# Altium PCB KC_BaseBoard4CompareTest-V0.31.PcbDoc
Units mil, origin at the board's own origin, x right, y up, seen from the top; angles counter-clockwise.
Board outline 6850 x 2705 mil, 2 copper layers (Top Layer, Bottom Layer); 38 components, 27 nets, 101 pads, 4 vias.
Unrouted connection lines stored in the file: 1.
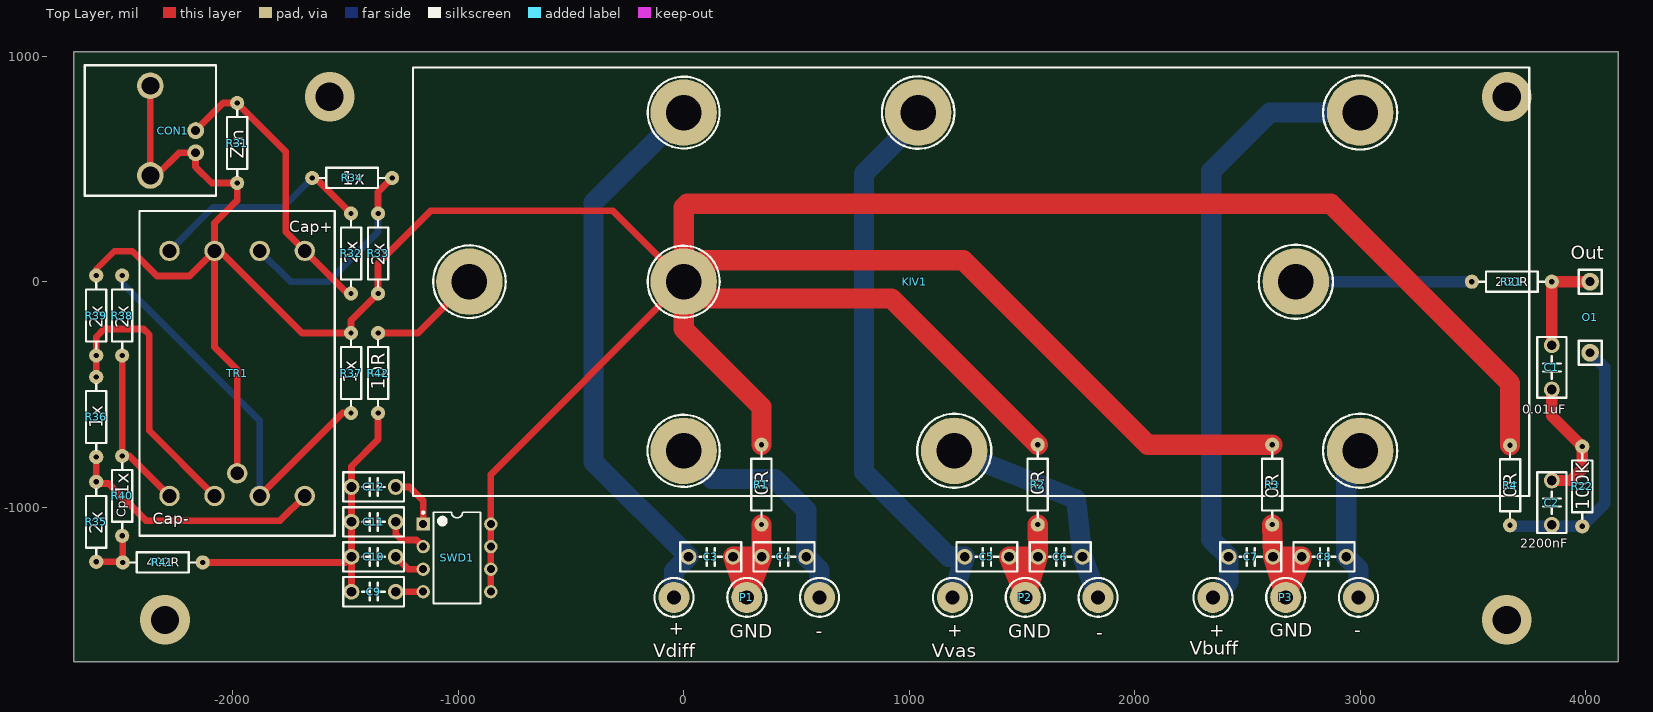
[diagram p0: Top Layer view]
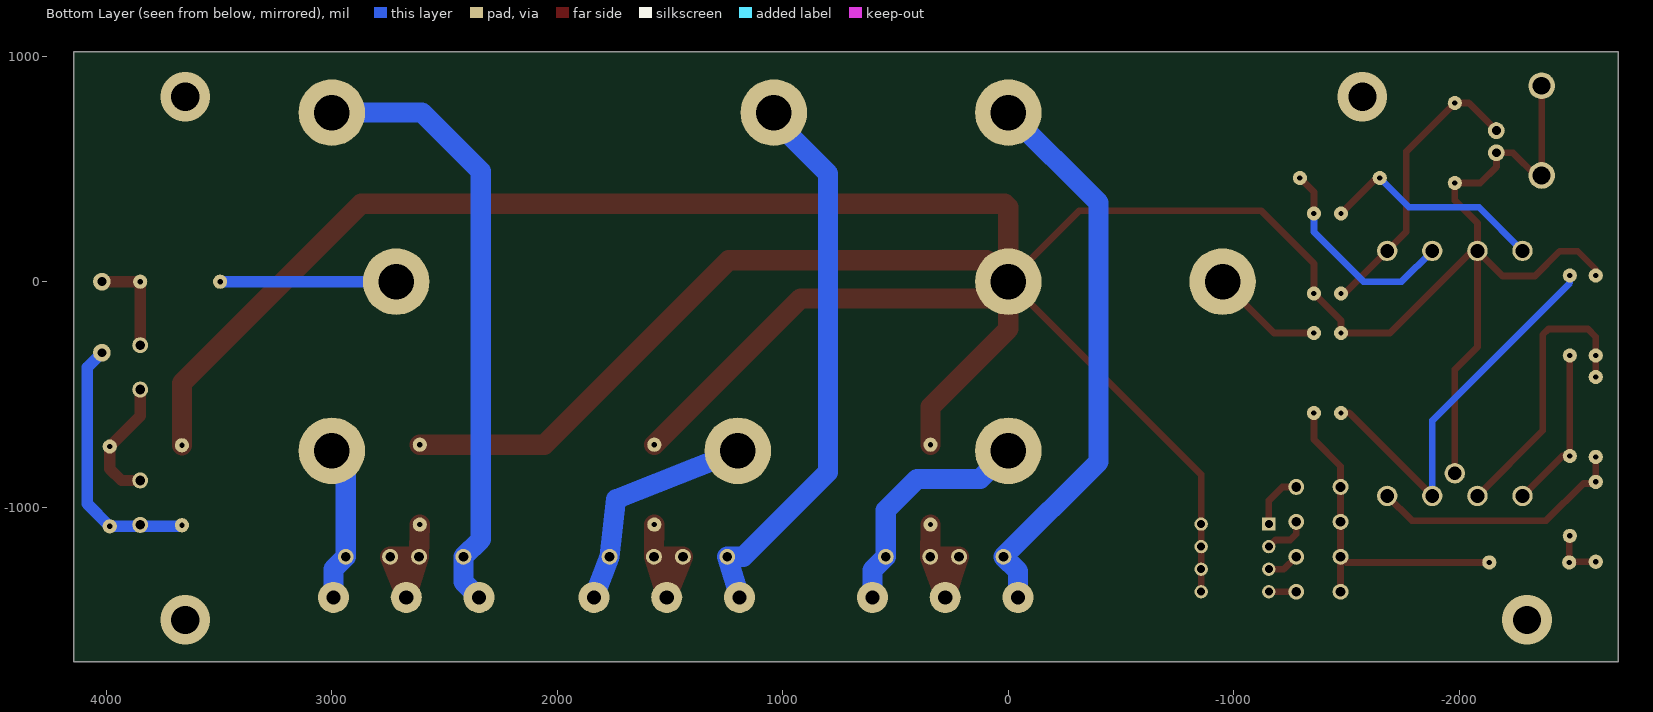
[diagram p1: Bottom Layer view, seen from below]

## Layer stack, top to bottom
Top Solder: solder mask 0.4, Solder Resist, Dk 3.5
Top Layer: signal copper 1.4
Dielectric 1: dielectric 12.6, FR-4, Dk 4.8
Bottom Layer: signal copper 1.4
Bottom Solder: solder mask 0.4, Solder Resist, Dk 3.5

## Board outline
-2705,-1685 4145,-1685 4145,1020 -2705,1020

## Design rules (kind name [scope] priority, off if disabled: settings)
Clearance [All] p1: gap=10 ignorepadtopadclearanceinfootprint=FALSE except(0: Arc-Hole Track-Hole SMDPad-Hole THPad-Hole Via-Hole Fill-Hole Poly-Hole Region-Hole Text-Hole)
PolygonConnect [All] p1: connectstyle=Relief reliefconductorwidth=10 reliefentries=4 polygonreliefangle="90 Angle" airgapwidth=10
RoomDefinition KC_BaseBoard4CompareTest-V0.31 [InComponentClass('KC_BaseBoard4CompareTest-V0.31')] p1: confinementstyle=ConfineIn formatcopy=TRUE lockcomponents=FALSE outline -3200,-3820 -1200,-3820 -1200,-2820 -3200,-2820
RoutingVias [All] p1: holewidth=28 width=50 viastyle="Through Hole" minholewidth=28 minwidth=50 maxholewidth=28 maxwidth=50
SolderMaskExpansion [All] p1: expansion=4
Width [All] p1: maxlimit=100 minlimit=10 preferedwidth=50
30 further rules are at their usual default settings.

## Components (designator, comment, footprint, x,y, rotation, side; value= is the part's Value field where it differs from the comment)
C1 "0.01uF" "CBB 6.3*6.3*5" 3850,-380 r90 top
C2 "2200nF" "CBB 6.3*6.3*5" 3850,-980 r270 top
C3 "0.01uF" "CBB 6.3*6.3*5" 120,-1220 r180 top
C4 "0.01uF" "CBB 6.3*6.3*5" 445,-1220 r180 top
C5 "0.01uF" "CBB 6.3*6.3*5" 1345,-1220 r0 top
C6 "0.01uF" "CBB 6.3*6.3*5" 1670,-1220 r180 top
C7 "0.01uF" "CBB 6.3*6.3*5" 2515,-1220 r0 top
C8 "0.01uF" "CBB 6.3*6.3*5" 2840,-1220 r180 top
C9 "100pF" "CBB 6.3*6.3*5" -1375,-1375 r180 top
C10 "100pF" "CBB 6.3*6.3*5" -1375,-1220 r180 top
C11 "100pF" "CBB 6.3*6.3*5" -1375,-1065 r180 top
C12 "20pF" "CBB 6.3*6.3*5" -1375,-910 r180 top
CON1 "RCA" RCA-RJ255 -2365,670 r0 top
KIV1 "KCInputVas_SP" KCIn_VAS_SP_M4 0,0 r0 top
O1 "Out" Signal_Terminal 4020,0 r270 top
P1 "Vdiff" KC_MBPowerReg4Compare-1.5mm 280,-1400 r90 top
P2 "Vvas" KC_MBPowerReg4Compare-1.5mm 1515,-1400 r90 top
P3 "Vbuff" KC_MBPowerReg4Compare-1.5mm 2670,-1400 r90 top
R1 "0R" "RS 1/4W" 345,-900 r270 top
R2 "0R" "RS 1/4W" 1570,-900 r270 top
R3 "0R" "RS 1/4W" 2610,-900 r270 top
R4 "0R" "RS 1/4W" 3665,-902.83 r90 top
R21 "200R" "RS 1/4W" 3672.83,0 r180 top
R22 "100K" "RS 1/4W" 3985,-907.83 r270 top
R31 "Zin" "RS 1/4W" -1980,615 r270 top
R32 "2x" "RS 1/4W" -1475,125 r270 top
R33 "2x" "RS 1/4W" -1355,125 r90 top
R34 "1x" "RS 1/4W" -1470,460 r0 top
R35 "2x" "RS 1/4W" -2605,-1065 r90 top
R36 "1x" "RS 1/4W" -2605,-600 r270 top
R37 "1x" "RS 1/4W" -1475,-405 r90 top
R38 "2x" "RS 1/4W" -2490,-150 r90 top
R39 "2x" "RS 1/4W" -2605,-150 r90 top
R40 "1x" "RS 1/4W" -2490,-950 r90 top
R41 "402R" "RS 1/4W" -2310,-1245 r0 top
R42 "10R" "RS 1/4W" -1355,-405 r90 top
SWD1 "SW-DIP4" DIP-8 -1005,-1225 r0 top
TR1 "LL1527" LL1527 -1980,-406.69 r270 top

## Footprints (in the part's own frame and the unit in brackets; to place one, negate y for a bottom-side part, rotate by r counter-clockwise, add the part's x,y. Pads: shape width x height; smd on the part's side, far side on the other; paste and mask are expansions set on the pad)
"CBB 6.3*6.3*5" [mm] "脚距5mm高6.3mm厚3mm"
  round 1.8 hole 1.1: 1(-2.5,0) 2(2.5,0)
  silkscreen extent -3.43,-1.65 3.43,1.65, body extent -3.15,-1.5 3.15,1.5, height 6.8
DIP-8 [mm] "DIP; 8 Leads; Row Spacing 7.62 mm; Pitch 2.54 mm"
  rect 1.5x1.5 hole 0.9: 1(-3.81,3.81)
  round 1.5 hole 0.9: 2(-3.81,1.27) 3(-3.81,-1.27) 4(-3.81,-3.81) 5(3.81,-3.81) 6(3.81,-1.27) 7(3.81,1.27) 8(3.81,3.81)
  silkscreen extent -3.93,-5.15 2.65,5.23, body extent -3.6,-5.15 3.6,5.15, height 5.08
KC_MBPowerReg4Compare-1.5mm [mm] "1.5mm hole size"
  round 3.5 hole 1.6: 1(0,8.2) 2(0,-8.2) 3(0,0)
  silkscreen extent -2.2,-10.4 2.2,10.4
KCIn_VAS_SP_M4 [mm]
  round 7.5 hole 4: 1(-24.13,0) 2(0,0) 3(0,19.05) 4(0,-19.05) 5(26.416,19.05) 6(30.48,-19.05) 7(76.2,19.05) 8(76.2,-19.05) 9(68.961,0)
  silkscreen extent -30.48,-24.13 95.25,24.13
LL1527 [mm] "Lundahl LL1527"
  round 2.3 hole 1.55: 1(-13.8,-7.62) 2(-13.8,-2.54) 3(-13.8,2.54) 4(-13.8,7.62) 5(13.8,-7.62) 6(13.8,-2.54) 7(13.8,2.54) 8(13.8,7.62) 9(11.26,0)
  silkscreen extent -18.3,-11 18.3,11
RCA-RJ255 [mm] "RCA Socket"
  round 1.9 hole 1: 1(5.1,0) 2(5.1,-2.5)
  round 3 hole 2.02: 2(0,-5.05) 2(0,5.05)
  silkscreen extent -7.4,-7.35 7.4,7.35
"RS 1/4W" [mm] "直插色环电阻，脚距9mm，直径2.3mm"
  round 1.6 hole 0.6: 1(-4.5,0) 2(4.5,0)
  silkscreen extent -3.68,-1.14 3.68,1.14, body extent -4.72,-1.16 4.73,1.16, height 2.32
Signal_Terminal [mm] "Signal Path Pin"
  round 2 hole 1: 1(0,0) 2(8,0)
  silkscreen extent -1.35,-1.3 9.35,1.3

## Part data
C1 C2 C3 C4 C5 C6 C7 C8 C9 C10 C11 C12: library part C-CBB, "CBB电容", BOM名称=CBB电容, 学习资源=www.ooocke.com, 版权归属=源创客
CON1: "RCA Connector", Publisher="Altium Limited", Revision="17-Jul-2002: Re-released for DXP Platform."
KIV1: "King Cello Input Stage and VAS for Seperated Power"
O1: library part Signal_Out, "Signal Out"
P1 P2 P3: library part MainBoardPowerRegulator4CompareTest, "King Cello Compare Test Power"
R1 R2 R3 R4 R21 R22 R31 R32 R33 R34 R35 R36 R37 R38 R39 R40 R41 R42: library part R-CRR, "直插色环电阻", BOM名称=色环电阻, 学习资源=www.ooocke.com, 版权归属=源创客
SWD1: "DIP Switch", LatestRevisionDate=17-Jul-2002, LatestRevisionNote="Re-released for DXP Platform.", PackageReference=DIP-8, Published=24-Mar-1999, Publisher="Altium Limited"
TR1: "Lundahl LL1527"

## Via types
v1: diameter 220, hole 125, Top Layer to Bottom Layer, 4 vias

## Nets (pads, with @x,y where several pads share a name; then routed paths per layer and width w, separated by ;. In a path a pad name is that pad's centre, name@x,y a point inside that pad or via, vN(x,y) a via of type N, cw(c..) or ccw(c..) an arc to the next point about the centre after c; other vN are vias at no path point)
NetC1_1: C1.1 C1.2 C2.1 O1.1 R21.1 R22.1 | length 1022.5
  Top Layer w50: C2.1 3933.43,-881.57 3985,-830 R22.1 3850,-595.67 C1.1 ; C1.2 R21.1 O1.1
  Bottom Layer w50: C1.2@3845,-281.57 C1.2@3850,-276.57
NetC2_2: C2.2 O1.2 R4.1 R22.2 | length 1160.5
  Bottom Layer w50: R4.1 3670,-1085 R22.2 4085,-985 4085,-379.96 O1.2
NetC3_1: C3.1 C4.2 P1.3 R1.2 | length 653.2
  Top Layer w90: R1.2 C4.2 ; C4.2 P1.3 C3.1 C4.2
NetC3_2: C3.2 KIV1.3 P1.1 | length 2517
  Bottom Layer w90: P1.1 -42.83,-1284.41 C3.2 -400,-798.43 -400,350 KIV1.3
NetC4_1: C4.1 KIV1.4 P1.2 | length 1063.7
  Bottom Layer w90: KIV1.4 125,-875 405,-875 543.43,-1013.43 C4.1 602.83,-1279.41 P1.2
NetC5_1: C5.1 KIV1.5 P2.1 | length 2484.4
  Bottom Layer w90: KIV1.5 1040,720 800,480 800,-845 1175,-1220 C5.1 P2.1
NetC5_2: C5.2 C6.2 P2.3 R2.2 | length 653.4
  Top Layer w90: R2.2 C6.2 ; C6.2 P2.3 C5.2 C6.2
NetC6_1: C6.1 KIV1.6 P2.2 | length 1030.7
  Bottom Layer w90: KIV1.6 1740,-965 C6.1 P2.2
NetC7_1: C7.1 KIV1.7 P3.1 | length 2718.2
  Bottom Layer w90: P3.1 2416.57,-1330.59 C7.1 2340,-1143.43 2340,490 2600,750 KIV1.7
NetC7_2: C7.2 C8.2 P3.3 R3.2 | length 653.4
  Top Layer w90: R3.2 C7.2 ; C7.2 P3.3 C8.2 C7.2
NetC8_1: C8.1 KIV1.8 P3.2 | length 698
  Bottom Layer w90: P3.2 2992.83,-1274.41 C8.1 2938.43,-811.57 KIV1.8
NetC9_1: C9.1 SWD1.4 | length 121.6
  Top Layer w30: C9.1 SWD1.4
NetC9_2: C9.2 C10.2 C11.2 C12.2 R41.2 R42.1 | length 1511.7
  Top Layer w30: R41.2 -1498.43,-1245 C10.2 ; C9.2 C10.2 ; R42.1 -1355,-700 -1473.43,-818.43 C12.2 C10.2
NetC10_1: C10.1 SWD1.3 | length 144.4
  Top Layer w30: C10.1 -1221.57,-1275 SWD1.3
NetC11_1: C11.1 SWD1.2 | length 198.4
  Top Layer w30: C11.1 -1276.57,-1118.43 -1250,-1145 -1185,-1145 SWD1.2
NetC12_1: C12.1 SWD1.1 | length 251.4
  Top Layer w30: C12.1 -1215,-910 -1155,-970 SWD1.1
NetCON1_1: CON1.1 R31.1 R32.2 TR1.4 | length 1297.8
  Top Layer w30: CON1.1 -2042.05,792.17 R31.1 -1765,577.17 -1765,221.61 TR1.4 -1491.22,-52.17 R32.2
NetCON1_2: CON1.2 KIV1.2 R1.1 R2.1 R3.1 R4.2 R31.2 R33.1 R37.2 R39.2 SWD1.5 SWD1.6 SWD1.7 SWD1.8 TR1.2 TR1.9 | length 17719.5
  Top Layer w30: R39.2 -2605,55 -2525,135 -2445,135 -2335,25 -2191.61,25 TR1.2 ; CON1.2@-2365,868.82 -2365,471.18 -2338.82,471.18 -2238.43,571.57 -2164.21,571.57 -2164.21,509.21 -2092.83,437.83 R31.2 -1980,360 -2080,260 TR1.2 ; TR1.9 -1980,-390 -2080,-290 TR1.2 ; SWD1.5 SWD1.8 -855,-855 KIV1.2 -315,315 -1120,315 -1355,80 R33.1 -1475,-172.17 R37.2 -1692.17,-227.83 -2056.61,136.61 TR1.2
  Top Layer w90: R1.1 345,-555 0,-210 KIV1.2 ; R2.1 922.17,-75 75,-75 KIV1.2 ; R3.1 2057.83,-722.83 1240,95 95,95 KIV1.2 ; R4.2 3665,-450 2870,345 15,345 0,330 KIV1.2
NetKIV1_1: KIV1.1 R42.2 | length 499.4
  Top Layer w30: R42.2 -1177.83,-227.83 KIV1.1
NetKIV1_9: KIV1.9 R21.2 | length 780.7
  Bottom Layer w50: KIV1.9 R21.2
NetR32_1: R32.1 R34.1 TR1.1 | length 1004.3
  Top Layer w30: R34.1 -1632.83,460 R32.1
  Bottom Layer w30: TR1.1 -2086.61,330 -1777.17,330 R34.1
NetR33_2: R33.2 R34.2 TR1.3 | length 938.5
  Top Layer w30: R33.2 -1355,397.83 R34.2
  Bottom Layer w30: TR1.3 -1743.39,0 -1575,0 -1355,220 R33.2
NetR35_1: R35.1 R40.1 R41.1 | length 238
  Top Layer w30: R35.1 -2490,-1242.17 R41.1 -2487.17,-1130 R40.1
NetR35_2: R35.2 R36.2 TR1.8 | length 1152.5
  Top Layer w30: R36.2 R35.2 -2597.83,-895 -2550,-895 -2385,-1060 -1790,-1060 TR1.8
NetR36_1: R36.1 R39.1 TR1.6 | length 1272.8
  Top Layer w30: R36.1 R39.1 -2605,-245 -2570,-210 -2395,-210 -2370,-235 -2370,-660 TR1.6
NetR37_1: R37.1 R38.2 TR1.7 | length 1787.2
  Top Layer w30: TR1.7 -1512.17,-582.17 R37.1
  Bottom Layer w30: R38.2 -2490,-5 -1880,-615 TR1.7
NetR38_1: R38.1 R40.2 TR1.5 | length 729.1
  Top Layer w30: R38.1 R40.2 -2457.17,-772.83 TR1.5
copper on no net:
  other v1: -2300,-1500 3650,-1500 -1570,820 3650,820

## Silkscreen, mask and mechanical layers (free items; w line width, h text height)
Top Overlay:
  text "Cap+" at -1750,220 h50
  text "Cp" at -2475,-1045 h40 r90
  text "Cap-" at -2355,-1075 h50
  text "+" at -65,-1565 h60
  text "+" at 1170,-1575 h60
  text "+" at 2330,-1575 h60
  text "GND" at 2600,-1575 h60
  text "-" at 2975,-1575 h60
  text "GND" at 205,-1580 h60
  text "-" at 585,-1580 h60
  text "GND" at 1440,-1580 h60
  text "-" at 1830,-1585 h60
Drill Drawing:
  the board outline again, w10